# Altium PCB PA_CPLBridgre_R01.PcbDoc
Units mm, origin at the board's own origin, x right, y up, seen from the top; angles counter-clockwise.
Board outline 31.58 x 44.7 mm, 2 copper layers (Top Layer, Bottom Layer); 20 components, 17 nets, 72 pads, 327 vias.
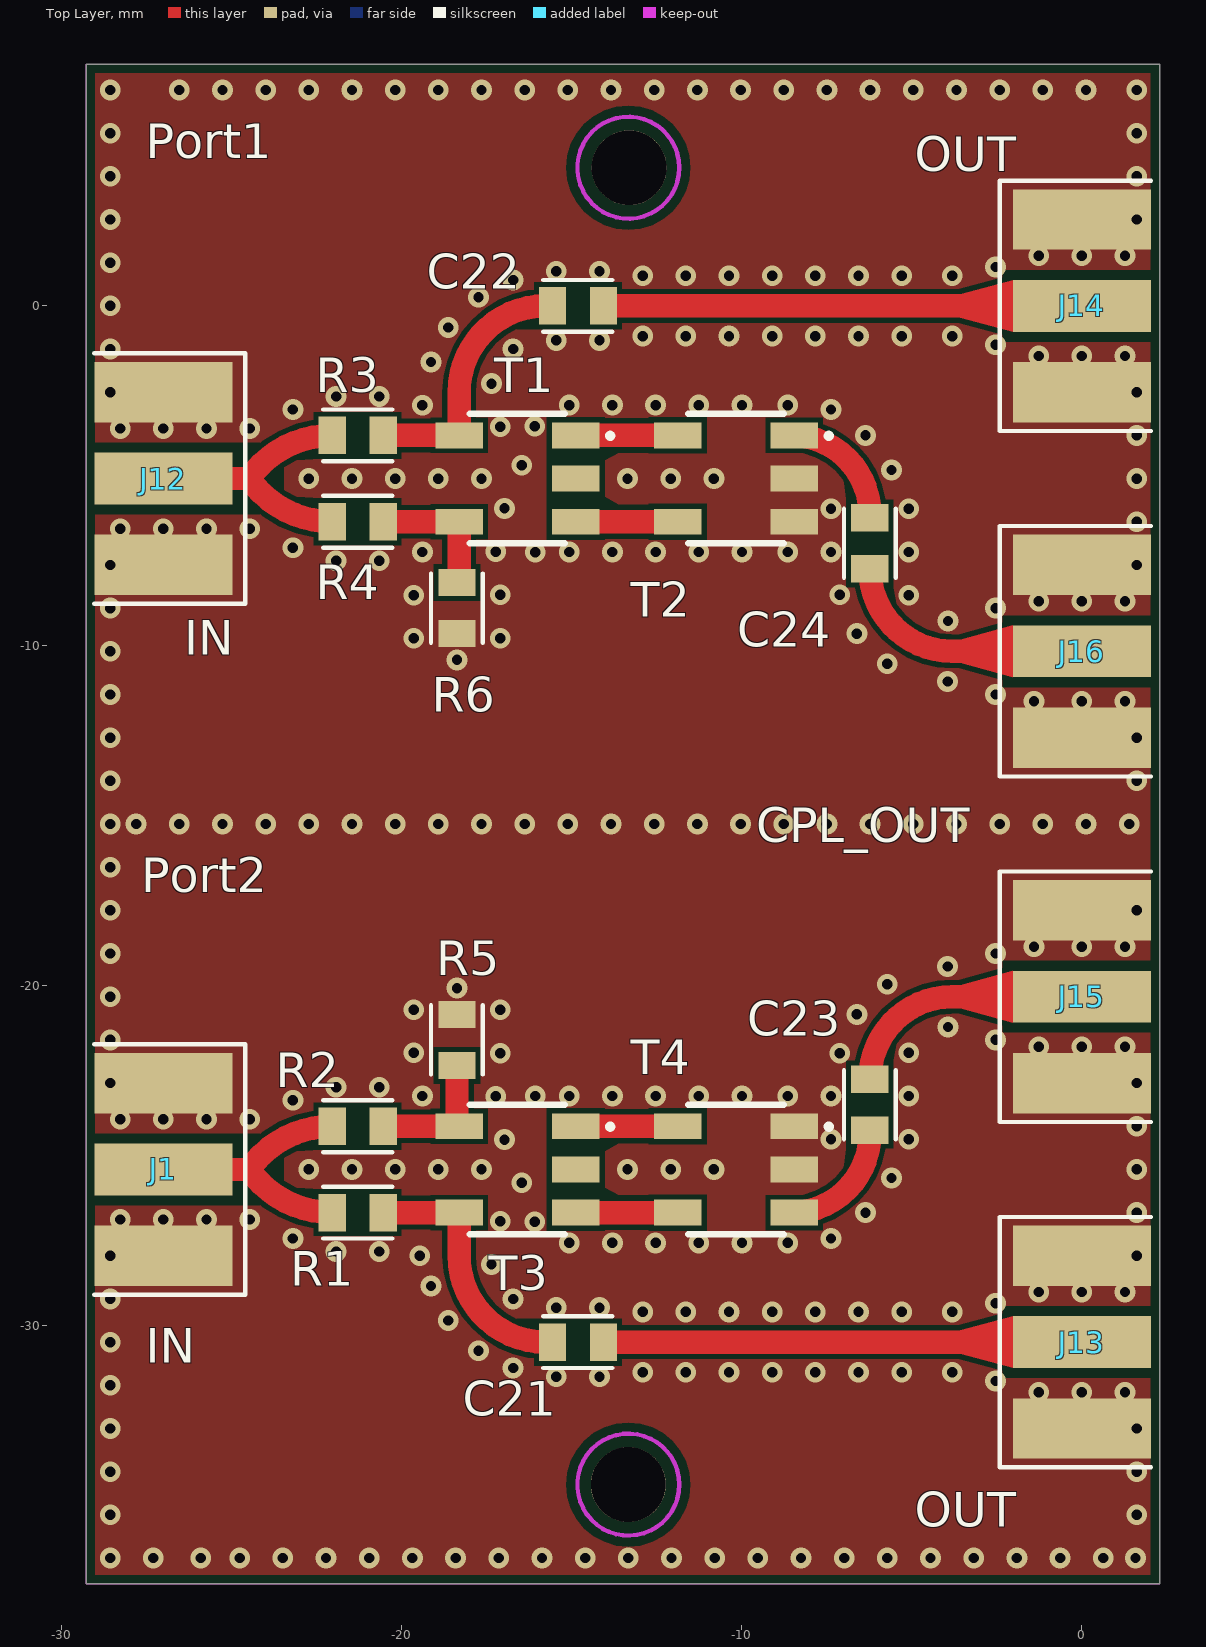
[diagram p0: Top Layer view]
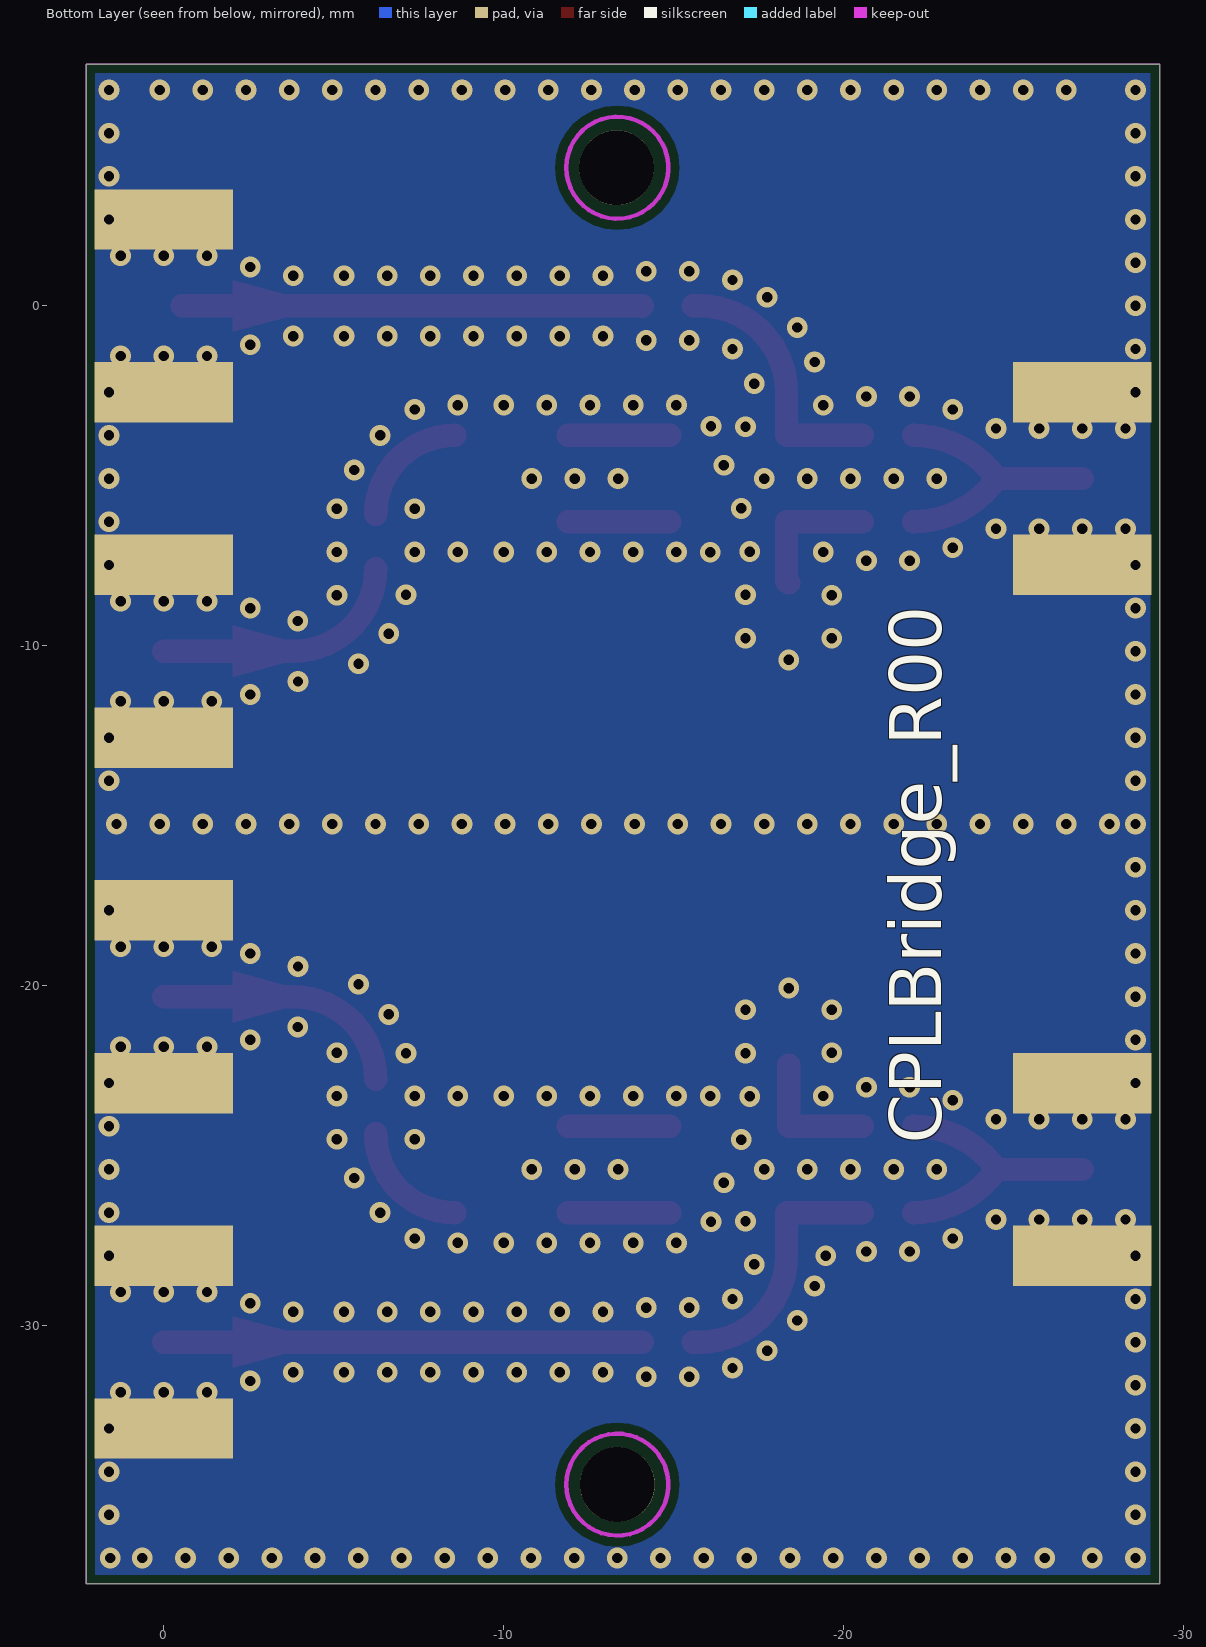
[diagram p1: Bottom Layer view, seen from below]

## Layer stack, top to bottom
Top Solder: solder mask 0.0102, Solder Resist, Dk 3.5
Top Layer: signal copper 0.0356
Dielectric 1: dielectric 0.32, FR-4, Dk 4.8
Bottom Layer: signal copper 0.0356
Bottom Solder: solder mask 0.0102, Solder Resist, Dk 3.5

## Board outline
-29.289,-37.592 -29.289,7.112 2.286,7.112 2.286,-37.592

## Design rules (kind name [scope] priority, off if disabled: settings)
AssemblyTestpoint [All] p1: testpointundercomponent=TRUE minsize=1.016 maxsize=2.54 preferedsize=1.524 minholesize=0 maxholesize=1.016 preferedholesize=0.813 testpointgrid=0.025 usegrid=TRUE gridoriginx=9.104 gridoriginy=0 gridtolerance=0 allowsidetop=TRUE allowsidebottom=TRUE
Clearance SMA_Clearance [(HasFootprint('SMA_Connector') AND  Not InNet('GND'))] p1: gap=0.305 ignorepadtopadclearanceinfootprint=FALSE
Clearance Clearance_1 [OnMid vs OnMid] p2: gap=0.152 ignorepadtopadclearanceinfootprint=FALSE sourcerule=40 cellrowname=All cellrowtype=0 cellcolname=All cellcoltype=0 innerlayers=TRUE
Clearance Clearance_2 [(ExistsOnLayer('Top Layer') Or ExistsOnLayer('Bottom Layer')) vs (ExistsOnLayer('Top Layer') Or ExistsOnLayer('Bottom Layer'))] p3: gap=0.152 ignorepadtopadclearanceinfootprint=FALSE sourcerule=40 cellrowname=All cellrowtype=0 cellcolname=All cellcoltype=0 outerlayers=TRUE
Clearance [All] p4: gap=0.254 ignorepadtopadclearanceinfootprint=FALSE ismatrix=TRUE
FabricationTestpoint [All] p1: side=3 testpointundercomponent=TRUE minsize=1.016 maxsize=2.54 preferedsize=1.524 minholesize=0 maxholesize=1.016 preferedholesize=0.813 testpointgrid=0.025 allowsidetop=TRUE allowsidebottom=TRUE usegrid=TRUE gridoriginx=9.104 gridoriginy=0 gridtolerance=0
PolygonConnect PolygonConnectStyle_1 [All] p1: thpad.connectstyle=Relief thpad.reliefconductorwidth=0.254 thpad.reliefentries=2 thpad.polygonreliefangle="0 Angle" thpad.airgapwidth=0.254 smdpad.connectstyle=Direct smdpad.reliefconductorwidth=0.254 smdpad.reliefentries=2 smdpad.polygonreliefangle="0 Angle" smdpad.airgapwidth=0.254 via.connectstyle=Direct via.reliefconductorwidth=0.254 via.reliefentries=2 via.polygonreliefangle="0 Angle" via.airgapwidth=0.254
PolygonConnect [All] p2: thpad.connectstyle=Relief thpad.reliefconductorwidth=0.254 thpad.reliefentries=4 thpad.polygonreliefangle="90 Angle" thpad.airgapwidth=0.254 smdpad.connectstyle=Direct smdpad.reliefconductorwidth=0.254 smdpad.reliefentries=4 smdpad.polygonreliefangle="90 Angle" smdpad.airgapwidth=0.254 via.connectstyle=Relief via.reliefconductorwidth=0.254 via.reliefentries=4 via.polygonreliefangle="90 Angle" via.airgapwidth=0.254
RoutingVias RoutingViaStyle_1 [All] p1: holewidth=0.305 width=0.61 viastyle="Through Hole" minholewidth=0.305 minwidth=0.61 maxholewidth=1.27 maxwidth=2.54
RoutingVias [All] p2: holewidth=0.711 width=1.27 viastyle="Through Hole" minholewidth=0.711 minwidth=1.27 maxholewidth=0.711 maxwidth=1.27
SolderMaskExpansion [All] p1: expansion=0.102 istentingtop=FALSE
Width MaxMinWidth_1 [All] p1: maxlimit=2.54 minlimit=0.152 preferedwidth=0.686 minimp=50.000000 maximp=50.000000 favimp=50.000000
Width [All] p2: maxlimit=0.254 minlimit=0.254 preferedwidth=0.254
28 further rules are at their usual default settings.

## Components (designator, comment, footprint, x,y, rotation, side; value= is the part's Value field where it differs from the comment)
C21 "1nF - RF" C_0603 -14.824,-30.48 r0 top
C22 "1nF - RF" C_0603 -14.824,0 r0 top
C23 "1nF - RF" C_0603 -6.235,-23.495 r270 top
C24 "1nF - RF" C_0603 -6.235,-6.985 r90 top
J1 "SMA_Connector" SMA_Connector -27.016,-25.4 r90 top
J12 "SMA_Connector" SMA_Connector -27.016,-5.08 r90 top
J13 "SMA_Connector" SMA_Connector 0,-30.48 r270 top
J14 "SMA_Connector" SMA_Connector 0,0 r270 top
J15 "SMA_Connector" SMA_Connector 0,-20.32 r270 top
J16 "SMA_Connector" SMA_Connector 0,-10.16 r270 top
R1 "50R - RF" R_0603 -21.301,-26.67 r180 top
R2 "50R - RF" R_0603 -21.301,-24.13 r180 top
R3 "50R - RF" R_0603 -21.301,-3.81 r180 top
R4 "50R - RF" R_0603 -21.301,-6.35 r180 top
R5 "50R - RF" R_0603 -18.38,-21.59 r270 top
R6 "50R - RF" R_0603 -18.38,-8.89 r90 top
T1 "MABA-007159-000000" MABA-007159-000000_1 -16.602,-5.08 r270 top
T2 "MABA-007159-000000" MABA-007159-000000_1 -10.172,-5.08 r270 top
T3 "MABA-007159-000000" MABA-007159-000000_1 -16.602,-25.4 r270 top
T4 "MABA-007159-000000" MABA-007159-000000_1 -10.172,-25.4 r270 top

## Footprints (in the part's own frame and the unit in brackets; to place one, negate y for a bottom-side part, rotate by r counter-clockwise, add the part's x,y. Pads: shape width x height; smd on the part's side, far side on the other; paste and mask are expansions set on the pad)
C_0603 [mm] "Chip Capacitor, 2-Leads,"
  rect 0.8x1.1 smd: 1(-0.75,0) 2(0.75,0)
  silkscreen extent -1.02,-0.76 1.02,0.76, body extent -1,-0.62 1,0.63, height 0.78
MABA-007159-000000_1 [mm]
  rect 0.76x1.4 smd: 1(-1.27,1.715) 2(0,1.715) 3(1.27,1.715) 4(1.27,-1.715) 5(-1.27,-1.715)
  silkscreen extent -1.91,-1.4 1.91,2.78, body extent -1.91,-1.91 1.91,1.91, height 2.6
R_0603 [mm] "Chip Resistor, 2-Leads,"
  rect 0.8x1.1 smd: 1(-0.75,0) 2(0.75,0)
  silkscreen extent -1.02,-0.76 1.02,0.76, body extent -0.89,-0.51 0.89,0.51, height 0.25
SMA_Connector [mil] "SMA PCB Connector 1.6mm / PN: EMPCB.CSMAFSTJ.A"
  rect 60x160 smd: 1(0,0)
  rect 70x160 smd: 2(-100,0) 2(100,0)
  rect 70x160 smd far side: 2(-100,0) 2(100,0)
  silkscreen extent -145,-95 145,80, body extent -121,-60 121,80, height 10

## Part data
C21 C22 C23 C24: library part "Ceramic Cap"
J1 J12 J13 J14 J15 J16: "Connector SMA"
R1 R2 R3 R4 R5 R6: library part Res1, "Resistor"
T1 T2 T3 T4: "Transformer", Manufacturer_Name=MACOM, Mouser Part Number=937-MABA007159000000, Datasheet Link=http://cdn.macom.com/datasheets/MABA-007159-000000.pdf, Manufacturer_Part_Number=MABA-007159-000000, Mouser Price/Stock=https://www.mouser.co.uk/ProductDetail/MACOM/MABA-007159-000000?qs=3Wmz%2FrCSAaFBkdkj62uXUA%3D%3D

## Free pads (board coordinates)
  round 2.2 hole 2.2: 4(-13.34,-34.671) 4(-13.316,4.064)

## Via types
v1: diameter 0.61, hole 0.305, Top Layer to Bottom Layer, tented both sides, 327 vias

## Nets (pads, with @x,y where several pads share a name; then routed paths per layer and width w, separated by ;. In a path a pad name is that pad's centre, name@x,y a point inside that pad or via, vN(x,y) a via of type N, cw(c..) or ccw(c..) an arc to the next point about the centre after c; other vN are vias at no path point)
GND: J1.2 J12.2 J13.2 J14.2 J15.2 J16.2 R5.1 R6.1 T2.2 T2.3 T4.1 T4.2
  other v1: -28.58,-36.83 -27.31,-36.83 -25.913,-36.83 -24.77,-36.83 -23.5,-36.83 -22.23,-36.83 -20.96,-36.83 -19.69,-36.83 -18.42,-36.83 -17.15,-36.83 -15.88,-36.83 -14.61,-36.83 -13.34,-36.83 -12.07,-36.83 -10.8,-36.83 -9.53,-36.83 -8.26,-36.83 -6.99,-36.83 -5.72,-36.83 -4.45,-36.83 -3.18,-36.83 -1.91,-36.83 -0.64,-36.83 0.63,-36.83 1.576,-36.83 -28.58,-35.56 1.611,-35.56 -28.58,-34.29 1.611,-34.29 -28.58,-33.02 1.611,-33.02 -1.27,-31.953 0,-31.953 1.27,-31.953 -28.58,-31.75 -2.54,-31.623 -15.459,-31.496 -14.189,-31.496 -12.919,-31.369 -11.649,-31.369 -10.379,-31.369 -9.109,-31.369 -7.839,-31.369 -6.569,-31.369 -5.299,-31.369 -3.81,-31.369 -16.729,-31.242 -17.745,-30.734 -28.58,-30.48 -18.634,-29.845 -12.919,-29.591 -11.649,-29.591 -10.379,-29.591 -9.109,-29.591 -7.839,-29.591 -6.569,-29.591 -5.299,-29.591 -3.81,-29.591 -15.459,-29.464 -14.189,-29.464 -2.54,-29.337 -28.58,-29.21 -16.729,-29.21 -1.27,-29.007 0,-29.007 1.27,-29.007 -19.142,-28.829 -17.364,-28.194 -28.58,-27.94 -19.471,-27.94 1.611,-27.94 -21.936,-27.813 -20.666,-27.813 -15.078,-27.561 -13.808,-27.561 -12.538,-27.561 -11.268,-27.561 -9.998,-27.561 -8.648,-27.561 -23.206,-27.432 -7.378,-27.432 -17.11,-26.924 -16.094,-26.936 -28.286,-26.873 -27.016,-26.873 -25.746,-26.873 -24.476,-26.873 -6.362,-26.67 1.611,-26.67 -16.475,-25.793 -5.6,-25.654 -22.738,-25.4 -21.468,-25.4 -20.198,-25.4 -18.928,-25.4 -17.658,-25.4 -13.363,-25.4 -12.093,-25.4 -10.823,-25.4 1.611,-25.4 -16.983,-24.523 -7.378,-24.511 -5.092,-24.511 1.611,-24.13 1.611,-24.13 -28.286,-23.927 -27.016,-23.927 -25.746,-23.927 -24.476,-23.927 -23.206,-23.368 -19.396,-23.241 -17.237,-23.253 -16.077,-23.241 -15.078,-23.239 -13.808,-23.239 -12.538,-23.239 -11.268,-23.239 -9.998,-23.239 -8.648,-23.239 -7.378,-23.241 -5.092,-23.241 -21.936,-22.987 -20.666,-22.987 -28.58,-22.86 1.611,-22.86 1.611,-22.86 -19.65,-21.971 -17.11,-21.983 -7.124,-21.983 -5.092,-21.971 -1.27,-21.793 0,-21.793 1.27,-21.793 -28.58,-21.59 -2.54,-21.59 -3.937,-21.209 -6.616,-20.84 -19.65,-20.701 -17.11,-20.701 -28.58,-20.32 -18.38,-20.066 -5.727,-19.951 -3.949,-19.431 -28.58,-19.05 -2.54,-19.05 -1.409,-18.847 0,-18.847 1.27,-18.847 -28.58,-17.78 1.611,-17.78 -28.58,-16.51 -28.58,-15.24 -27.818,-15.24 -26.548,-15.24 -25.278,-15.24 -24.008,-15.24 -22.738,-15.24 -21.468,-15.24 -20.198,-15.24 -18.928,-15.24 -17.658,-15.24 -16.388,-15.24 -15.118,-15.24 -13.848,-15.24 -12.578,-15.24 -11.308,-15.24 -10.038,-15.24 -8.768,-15.24 -7.498,-15.24 -6.228,-15.24 -4.958,-15.24 -3.688,-15.24 -2.418,-15.24 -1.148,-15.24 0.122,-15.24 1.392,-15.24 -28.58,-13.97 1.611,-13.97 -28.58,-12.7 1.611,-12.7 -1.409,-11.633 0,-11.633 1.27,-11.633 -28.58,-11.43 -2.54,-11.43 -3.949,-11.049 -5.727,-10.529 -18.38,-10.414 -28.58,-10.16 -19.65,-9.779 -17.11,-9.779 -6.616,-9.64 -3.937,-9.271 -28.58,-8.89 -2.54,-8.89 -1.27,-8.687 0,-8.687 1.27,-8.687 -19.65,-8.509 -5.092,-8.509 -17.11,-8.497 -7.124,-8.497 -28.58,-7.62 1.611,-7.62 1.611,-7.62 -21.936,-7.493 -20.666,-7.493 -19.396,-7.239 -16.077,-7.243 -15.078,-7.241 -13.808,-7.241 -12.538,-7.241 -11.268,-7.241 -9.998,-7.241 -8.648,-7.241 -7.378,-7.239 -5.092,-7.239 -17.237,-7.227 -23.206,-7.112 -28.286,-6.553 -27.016,-6.553 -25.746,-6.553 -24.476,-6.553 1.611,-6.35 1.611,-6.35 -7.378,-5.969 -5.092,-5.969 -16.983,-5.957 -22.738,-5.08 -21.468,-5.08 -20.198,-5.08 -18.928,-5.08 -17.658,-5.08 -13.363,-5.08 -12.093,-5.08 -10.823,-5.08 1.611,-5.08 -5.6,-4.826 -16.475,-4.687 -6.362,-3.81 1.611,-3.81 -28.286,-3.607 -27.016,-3.607 -25.746,-3.607 -24.476,-3.607 -17.11,-3.556 -16.094,-3.544 -23.206,-3.048 -7.378,-3.048 -19.396,-2.921 -15.078,-2.919 -13.808,-2.919 -12.538,-2.919 -11.268,-2.919 -9.998,-2.919 -8.648,-2.919 -21.936,-2.667 -20.666,-2.667 -28.58,-2.54 1.611,-2.54 -17.364,-2.286 -19.142,-1.651 -1.27,-1.473 0,-1.473 1.27,-1.473 -28.58,-1.27 -16.729,-1.27 -2.54,-1.143 -15.459,-1.016 -14.189,-1.016 -12.919,-0.889 -11.649,-0.889 -10.379,-0.889 -9.109,-0.889 -7.839,-0.889 -6.569,-0.889 -5.299,-0.889 -3.81,-0.889 -18.634,-0.635 -28.58,0 -17.745,0.254 -16.729,0.762 -12.919,0.889 -11.649,0.889 -10.379,0.889 -9.109,0.889 -7.839,0.889 -6.569,0.889 -5.299,0.889 -3.81,0.889 -15.459,1.016 -14.189,1.016 -2.54,1.143 -28.58,1.27 -1.27,1.473 0,1.473 1.27,1.473 -28.58,2.54 1.611,2.54 -28.58,3.81 1.611,3.81 -28.58,5.08 1.611,5.08 -28.58,6.35 -26.548,6.35 -25.278,6.35 -24.008,6.35 -22.738,6.35 -21.468,6.35 -20.198,6.35 -18.928,6.35 -17.658,6.35 -16.388,6.35 -15.118,6.35 -13.848,6.35 -12.578,6.35 -11.308,6.35 -10.038,6.35 -8.768,6.35 -7.498,6.35 -6.228,6.35 -4.958,6.35 -3.688,6.35 -2.418,6.35 -1.148,6.35 0.122,6.35 1.611,6.35
NetC21_1: C21.1 R1.1 T3.4 | length 7.7
  Top Layer w0.686: R1.1 T3.4 -18.317,-27.94 ccw(c-15.777,-27.94) -15.777,-30.48 C21.1
NetC21_2: C21.2 J13.1 | length 14.1
  Top Layer w0.686: C21.2 J13.1
NetC22_1: C22.1 R3.1 T1.5 | length 7.7
  Top Layer w0.686: R3.1 T1.5 -18.317,-2.54 cw(c-15.777,-2.54) -15.777,0 C22.1
NetC22_2: C22.2 J14.1 | length 13.6
  Top Layer w0.686: C22.2@-14.063,-0.011 C22.2 J14.1@-0.536,0
NetC23_1: C23.1 J15.1 | length 7.6
  Top Layer w0.686: C23.1 cw(c-3.81,-22.745) -3.81,-20.32 J15.1
NetC23_2: C23.2 T4.3 | length 3.7
  Top Layer w0.686: T4.3@-8.558,-26.672 ccw(c-8.558,-24.346) C23.2@-6.233,-24.346
NetC24_1: C24.1 J16.1 | length 7.6
  Top Layer w0.686: C24.1 ccw(c-3.81,-7.735) -3.81,-10.16 J16.1
NetC24_2: C24.2 T2.1 | length 3.7
  Top Layer w0.686: T2.1@-8.558,-3.808 cw(c-8.558,-6.134) C24.2@-6.233,-6.134
NetJ1_1: J1.1 R1.2 R2.2 | length 8.2
  Top Layer w0.686: J1.1 -24.492,-25.4 ; R1.2 cw(c-22.051,-23.688) -24.492,-25.4 ; R2.2 ccw(c-22.051,-27.112) -24.492,-25.4
NetJ12_1: J12.1 R3.2 R4.2 | length 8.2
  Top Layer w0.686: J12.1 -24.492,-5.08 ; R4.2 cw(c-22.051,-3.368) -24.492,-5.08 ; R3.2 ccw(c-22.051,-6.792) -24.492,-5.08
NetR2_1: R2.1 R5.2 T3.5 | length 4
  Top Layer w0.686: R2.1 -18.38,-24.13 R5.2
NetR4_1: R4.1 R6.2 T1.4 | length 4.1
  Top Layer w0.686: R4.1 T1.4 -18.317,-8.077 cw(c-18.38,-8.077) R6.2
NetT1_1: T1.1 T2.5 | length 3
  Top Layer w0.686: T1.1 T2.5
NetT1_3: T1.3 T2.4 | length 3
  Top Layer w0.686: T1.3 T2.4
NetT3_1: T3.1 T4.5 | length 3
  Top Layer w0.686: T3.1 T4.5
NetT3_3: T3.3 T4.4 | length 3
  Top Layer w0.686: T3.3 T4.4
pads on no net: T1.2 T3.2

## Polygon pours and split planes (outlines as drawn)
GND on Top Layer "GND_TOP" (solid, pour order 0): -29.289,7.112 2.286,7.112 2.286,-37.592 -29.289,-37.592
GND on Bottom Layer "GND_BOT" (solid, pour order 1): -29.017,7.112 2.286,7.112 2.286,-37.592 -29.017,-37.592

## Keep-outs
Keep-Out Layer:
  circle w0.127: c-13.34,-34.671 r1.5
  circle w0.127: c-13.34,4.064 r1.5
  lines w0.025: -29.289,-37.592 -29.289,7.112 2.286,7.112 2.286,-37.592 -29.289,-37.592

## Silkscreen, mask and mechanical layers (free items; w line width, h text height)
Top Overlay:
  text "Port1" at -27.534,4.343 h1.02
  text "OUT" at -4.909,3.962 h1.02
  text "IN" at -26.396,-10.262 h1.02
  text "CPL_OUT" at -9.583,-15.782 h1.02
  text "Port2" at -27.661,-17.247 h1.02
  text "IN" at -27.539,-31.09 h1.02
  text "OUT" at -4.909,-35.916 h1.02
Bottom Overlay:
  text "CPLBridge_R00" at -22.865,-24.638 h1.52 r270
Mechanical 1:
  the board outline again, w0.254
Mechanical 12 (Mech12):
  lines w0.025: -29.289,-15.24 -6.789,-15.24 ; -18.039,-35.24 -18.039,4.76

## Dimensions
-29.289,7.112 to -29.289,-37.592 on Mechanical 12 (Mech12)
2.286,7.112 to -29.289,7.112 on Mechanical 12 (Mech12)